# EAGLE board matchbox_bob_v01 (EAGLE 7.4.0)
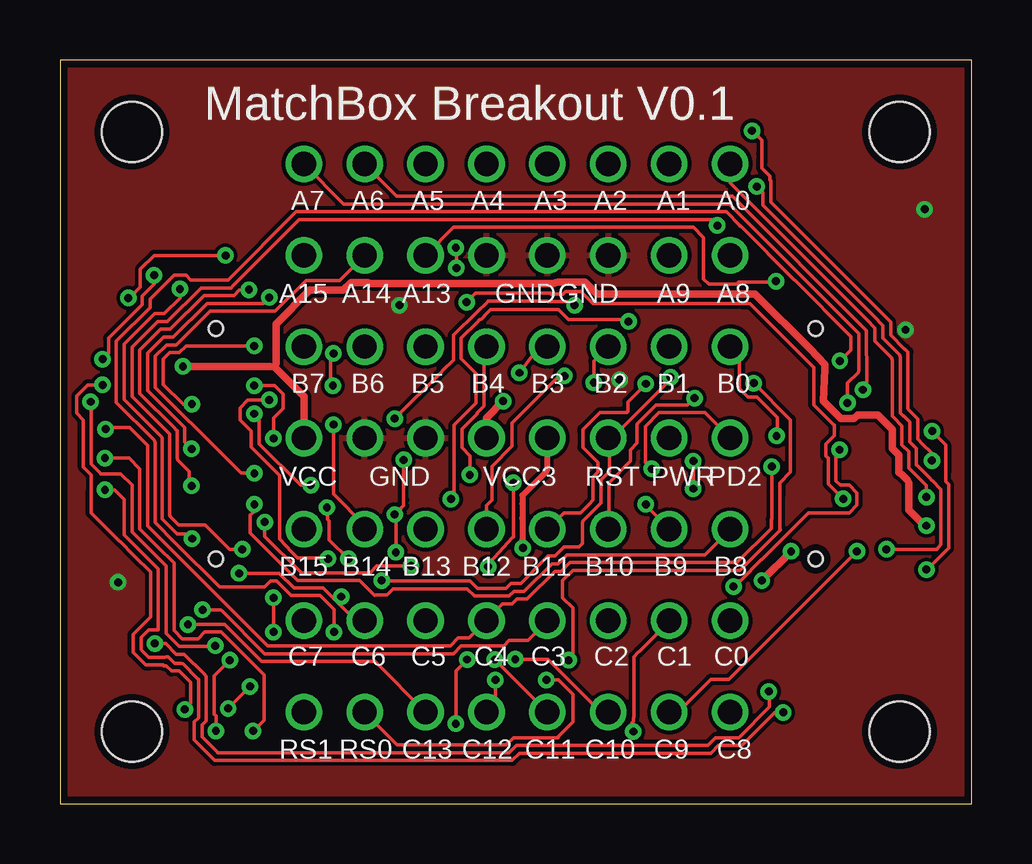
[diagram p0: board, top side]
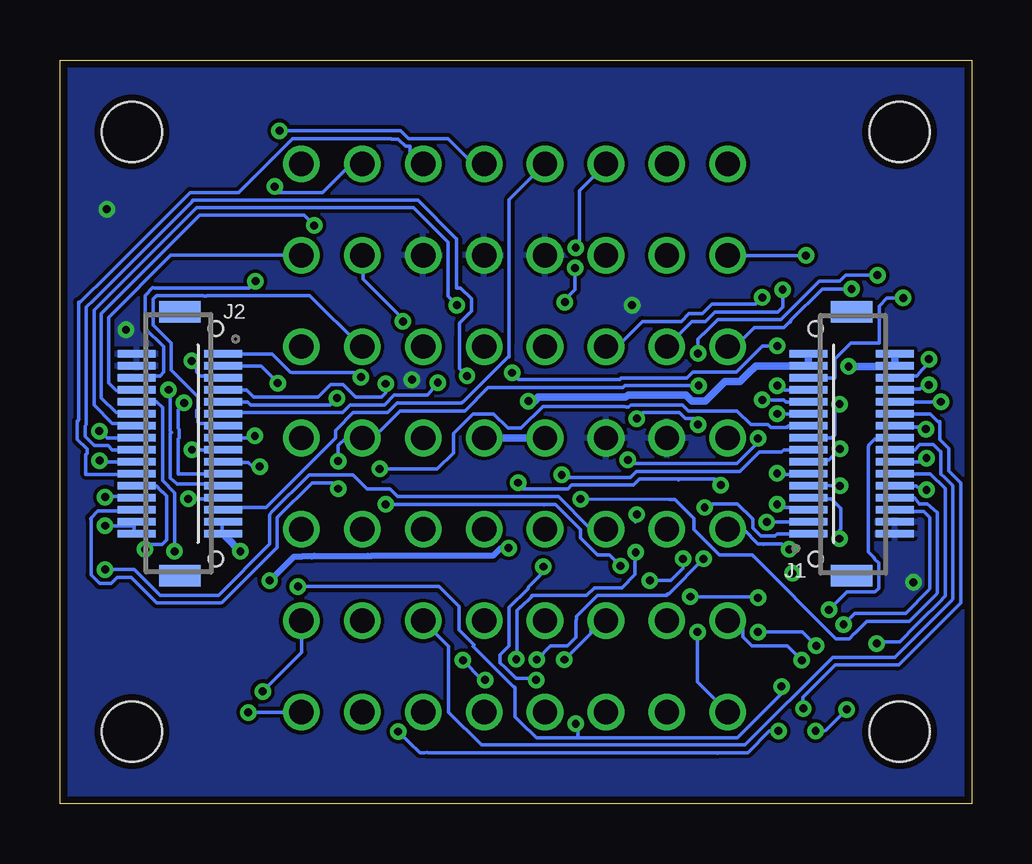
[diagram p1: board, bottom side, seen from below]

Size 38 x 31 mm. Coordinates in mm from the lower left corner, seen from the top.
Outline: 0,0 38,0 38,31 0,31 0,0
Copper layers (1*16): Top 0.0356mm / dielectric 1.5011mm / Bottom 0.0356mm
Design rules "LaenPCBOrder (2) *": minimum track width 6mil, minimum drill 13mil, track to track 6mil, track to pad 6mil, pad to pad 6mil, via to via 6mil, smd to smd 6mil, copper to edge 12mil, drill to drill 6mil, minimum pad ring 7mil, minimum via ring 7mil, stop-mask expansion 14mil, vias tented up to drill 14mil, thermal gap 6mil
Holes 2.5 mm at 3,28 35,28 35,3 3,3

## Footprints (pad centres in the part's own frame; a part is rotated, then mirrored left to right if it is on the bottom)
DF12-32-DS = smd 0.3 x 1.6: 1 -3.75,1.8; 2 -3.75,-1.8; 3 -3.25,1.8; 4 -3.25,-1.8; 5 -2.75,1.8; 6 -2.75,-1.8; 7 -2.25,1.8; 8 -2.25,-1.8; 9 -1.75,1.8; 10 -1.75,-1.8; 11 -1.25,1.8; 12 -1.25,-1.8; 13 -0.75,1.8; 14 -0.75,-1.8; 15 -0.25,1.8; 16 -0.25,-1.8; 17 0.25,1.8; 18 0.25,-1.8; 19 0.75,1.8; 20 0.75,-1.8; 21 1.25,1.8; 22 1.25,-1.8; 23 1.75,1.8; 24 1.75,-1.8; 25 2.25,1.8; 26 2.25,-1.8; 27 2.75,1.8; 28 2.75,-1.8; 29 3.25,1.8; 30 3.25,-1.8; 31 3.75,1.8; 32 3.75,-1.8 | smd 0.889 x 1.727: F1 -5.5,0; F2 5.5,0 | hole 0.6: -4.8,1.5; 4.8,1.5
1X08_FEMALE_LOCK = drill 1.016: 1 0,0; 2 2.54,0; 3 5.08,0; 4 7.62,0; 5 10.16,0; 6 12.7,0; 7 15.24,0; 8 17.78,0

## Placement (x,y rotation side)
J1  DF12-32-DS  [DF12-32-DS]  5,15 90 bottom
J2  DF12-32-DS  [DF12-32-DS]  33,15 270 bottom
PA0_7  [1X08_FEMALE_LOCK]  27.94,26.67 180 top
PA8_15  [1X08_FEMALE_LOCK]  27.94,22.86 180 top
PB0_7  [1X08_FEMALE_LOCK]  27.94,19.05 180 top
PB8_15  [1X08_FEMALE_LOCK]  27.94,11.43 180 top
PC0_7  [1X08_FEMALE_LOCK]  27.94,7.62 180 top
PC8_15  [1X08_FEMALE_LOCK]  27.94,3.81 180 top
PWR  [1X08_FEMALE_LOCK]  27.94,15.24 180 top

## Library data of the parts
J1 J2 = micro1292; PARTNO: AS-ITM-00012
PA0_7 PA8_15 PB0_7 PB8_15 PC0_7 PC8_15 PWR = SparkFun-Connectors

## Nets
GND: J1.2 J1.4 J2.2 J2.4 PA8_15.3 PA8_15.4 PA8_15.5 PWR.6 PWR.7
PA0: J2.26 PA0_7.1
PA1: J2.24 PA0_7.2
PA2: J2.22 PA0_7.3
PA3: J2.20 PA0_7.4
PA4: J2.27 PA0_7.5
PA5: J2.25 PA0_7.6
PA6: J2.23 PA0_7.7
PA7: J2.21 PA0_7.8
PA8: J2.8 PA8_15.1
PA9: J1.8 PA8_15.2
PA13: J2.6 PA8_15.6
PA14: J1.11 PA8_15.7
PA15: J1.27 PA8_15.8
PB0: J2.15 PB0_7.1
PB1: J2.13 PB0_7.2
PB2: J2.11 PB0_7.3
PB3: J1.17 PB0_7.4
PB4: J1.15 PB0_7.5
PB5: J1.13 PB0_7.6
PB6: J1.9 PB0_7.7
PB7: J1.7 PB0_7.8
PB8: J1.5 PB8_15.1
PB9: J1.3 PB8_15.2
PB10: J2.9 PB8_15.3
PB11: J2.7 PB8_15.4
PB12: J2.18 PB8_15.5
PB13: J2.16 PB8_15.6
PB14: J2.14 PB8_15.7
PB15: J2.12 PB8_15.8
PC0: J1.12 PC0_7.1
PC1: J1.14 PC0_7.2
PC2: J1.16 PC0_7.3
PC3: J1.18 PC0_7.4
PC4: J1.20 J2.19 PC0_7.5
PC5: J1.22 J2.17 PC0_7.6
PC6: J1.24 PC0_7.7
PC7: J1.26 PC0_7.8
PC8: J1.10 PC8_15.1
PC9: J2.10 PC8_15.2
PC10: J1.25 PC8_15.3
PC11: J1.23 PC8_15.4
PC12: J1.21 PC8_15.5
PC13: J1.6 PC8_15.6
PD2: J1.19 PWR.1
PWR_ON: J1.28 J2.28 PWR.2
RESET#: J1.1 J2.1 PWR.3
RSV0: J2.3 PC8_15.7
RSV1: J2.5 PC8_15.8
VCC: J1.30 J1.32 J2.30 J2.32 PWR.8
VCC_3V3: J1.29 J1.31 J2.29 J2.31 PWR.4 PWR.5

## Tracks (layer width: path | path; a pad name or v marks a point on that pad's centre or on a via)
GND  (via drill 0.33)
  other vias: 2.42,9.22 35.25,19.75 36.05,24.77 14.15,20.77 23.32,17.68
  pour Top: 0,0 38,0 38,31 0,31
  pour Bottom: 0,0 38,0 38,31 0,31
PA0  (via drill 0.33)
  Top 0.152: v36.12,12.78 36.12,13.26 36.08,13.3 35.38,14 35.38,14.68 35.1,14.95 35.1,15.75 34.75,16.1 34.7,16.15 34.7,18.5 34.67,18.52 34.67,18.57 33.98,19.27 33.98,19.75 33.98,19.82 33.62,20.18 27.94,25.86 PA0_7.1
  Bottom 0.152: v36.12,12.78 35.97,12.8 34.9,12.8 J2.26
PA1  (via drill 0.33)
  Top 0.152: v29.05,25.73 29.3,25.48 29.3,24.95 33.92,20.32 34.3,19.93 34.3,19.4 35,18.7 35,18.65 35.02,18.62 35.02,16.27 35.15,16.15 35.17,16.15 35.42,15.9 35.42,15.07 35.7,14.8 35.7,14.12 35.75,14.07 36.27,13.55 36.33,13.5 36.38,13.45 36.7,13.12 36.73,13.1 36.73,10.8 36.55,10.6 v34.45,10.6
  Bottom 0.152: v29.05,25.73 29.05,25.48 27.05,25.48 26.05,26.48 26.05,26.68 PA0_7.2 | v34.45,10.6 34.27,10.8 33.75,10.8 33.55,11 33.55,12.82 33.73,13 33.75,13 33.9,13.15 33.9,13.18 33.98,13.25 J2.24
PA2
  Bottom 0.152: PA0_7.3 22.88,26.68 23.38,26.68 23.4,26.7 23.4,27.4 23.6,27.4 23.9,27.7 24.18,27.7 24.2,27.73 28.3,27.73 30.55,25.48 32.58,25.48 35.88,22.18 35.92,22.12 37.15,20.9 37.23,20.9 37.23,16.02 37.25,15.95 37.27,15.95 37.27,15.18 36.88,14.78 36.88,14.6 36.92,14.55 36.92,13.72 35.55,13.72 35.52,13.75 34.83,13.75 J2.22
PA3  (via drill 0.33)
  Top 0.152: v28.85,28.05 29.25,27.65 29.25,27.07 29.25,26.82 29.25,26.7 29.25,26.5 29.6,26.15 29.6,26 29.62,25.98 29.62,25.07 34.12,20.57 34.62,20.07 34.62,20 34.62,19.52 35.2,18.95 35.23,18.95 35.35,18.82 35.35,16.48 35.38,16.4 35.75,16.02 35.75,15.2 35.98,14.97 36.3,14.65 36.3,14.38 v36.35,14.3
  Bottom 0.152: v28.85,28.05 28.1,28.05 23.8,28.05 23.48,27.73 21.82,27.73 20.95,26.85 20.95,26.68 PA0_7.4 | v36.35,14.3 36.3,14.25 34.83,14.25 J2.20
PA4
  Bottom 0.152: J2.27 31.09,12.34 29.41,12.34 26.52,15.24 26.52,15.54 26.48,15.6 25.77,16.3 24.48,16.3 24.35,16.3 23.95,16.7 21.32,16.7 21.25,16.69 21.23,16.75 21.2,16.75 19.32,18.62 19.27,18.62 19.27,19.18 19.27,25.18 PA0_7.5
PA5  (via drill 0.33)
  Top 0.152: v32.65,12.7 32.02,13.32 32.02,14.12 32.02,14.4 31.98,14.45 31.93,14.5 31.93,15 32.27,15.35 32.27,15.57 32.27,15.78 32.23,15.82 31.43,16.62 31.43,16.7 31.43,18.18 28.75,20.85 28.38,20.85 28.3,20.85 28.23,20.85 22.23,20.85 21.73,21.35 21.18,21.35 21.1,21.35 21.07,21.35 20.98,21.25 20.48,21.25 20.45,21.27 17.32,21.27 v16.95,20.9 | v16.52,22.32 16.52,23.15 v16.5,23.18
  Bottom 0.152: PA0_7.6 16.31,25.6 16.35,25.55 16.35,23.32 v16.5,23.18 | 31.09,12.8 J2.25 31.25,12.7 v32.65,12.7 | v16.52,22.32 16.52,21.43 17.05,20.9 v16.95,20.9
PA6  (via drill 0.33)
  Top 0.152: PA0_7.7 12.7,26.65 14.03,25.32 28.02,25.32 33.62,19.73 33.62,17.62 33.62,17.45 v33.47,17.25
  Bottom 0.152: 31.24,13.26 J2.23 31.35,13.32 33.12,13.32 33.4,13.57 33.4,15.43 33.35,15.47 33.4,15.53 33.4,17.25 33.45,17.25 v33.47,17.25
PA7  (via drill 0.33)
  Top 0.152: PA0_7.8 10.18,26.65 11.82,25 27.9,25 27.95,24.95 32.9,20 32.95,19.95 33.3,19.6 33.3,18.05 33.27,17.98 32.83,17.52 v32.83,16.7
  Bottom 0.152: v32.83,16.7 32.83,17 v32.83,16.7 | J2.21 | J2.21 31.27,13.75 33.08,13.75 33.08,15.2 33.02,15.25 33.02,15.32 33.02,15.6 33.08,15.65 33.08,16.4 32.85,16.62 v32.83,16.7
PA8
  Bottom 0.152: J2.8 34.9,17.22 35.66,17.22 35.97,17.53 35.97,20.27 33.38,22.86 28.04,22.86 PA8_15.1
PA9  (via drill 0.33)
  Top 0.152: v16.3,12.7 16.35,12.47 16.3,12.85 16.3,12.82 16.43,12.95 16.43,15.78 17.35,16.7 17.35,17.93 16.73,18.55 16.73,19.4 17.43,20.1 17.48,20.15 17.5,20.18 17.57,20.2 17.7,20.32 17.7,20.35 17.95,20.6 20.77,20.6 20.9,20.48 21.2,20.18 23.62,20.18 v23.7,20.1
  Bottom 0.152: v16.3,12.7 12.6,12.68 12.37,12.68 11.58,11.89 11.58,11.43 10.52,10.36 9.14,10.36 9.1,10.3 9.07,10.3 5.65,6.88 5.1,6.88 4.9,7.08 4.85,7.12 4.38,7.6 4.22,7.6 2.6,7.6 1.48,8.72 1.43,8.78 1.43,12.14 1.83,12.5 2.17,12.5 2.38,12.75 J1.8 | PA8_15.2 25.38,22.75 25.38,21.88 23.62,20.12 v23.7,20.1
PA13  (via drill 0.33)
  Top 0.152: PA8_15.6 15.25,22.88 16.4,24.02 21.25,24.02 21.32,24.02 26.4,24.02 26.82,23.6 26.82,21.88 27.05,21.65 28.23,21.65 28.25,21.68 28.27,21.75 29.82,21.75 v29.85,21.77
  Bottom 0.152: J2.6 34.75,17.83 33.83,17.83 33.68,17.98 33.68,19.05 34.44,19.81 34.44,21.18 34.13,21.5 34.05,21.5 33.98,21.5 30.12,21.5 v29.85,21.77
PA14  (via drill 0.33)
  Top 0.152: v8.11,13.77 v8.1,13.78 7.55,13.78 6.88,14.45 3.98,17.35 3.98,17.5 3.98,18.65 4.45,19.12 4.85,19.12 6.2,20.48 6.25,20.52 6.33,20.52 8.97,20.52 10.25,21.8 10.3,21.8 11.65,21.8 PA8_15.7
  Bottom 0.152: v8.11,13.77 7.82,13.77 7.75,13.72 6.86,13.72 J1.11
PA15  (via drill 0.33)
  Top 0.152: v2.85,21.07 2.9,21.07 3.35,21.52 3.35,22.27 3.92,22.85 v6.9,22.85
  Bottom 0.152: J1.27 5.7,17.75 5.7,18.54 5.04,19.2 3.85,19.2 3.85,20.75 3.52,21.07 v2.85,21.07 | J1.27 | v6.9,22.85 PA8_15.8
PB0  (via drill 0.33)
  Top 0.152: 29.88,15.4 v29.88,15.32 29.9,15.47 29.9,16.1 29.05,16.95 28.68,16.95 28.32,17.3 28.32,17.65 28.32,18.68 PB0_7.1
  Bottom 0.152: v29.88,15.32 29.95,15.25 30.23,15.25 31.18,15.25 J2.15
PB1
  Bottom 0.152: J2.13 31.24,15.85 32.16,15.85 32.24,15.88 32.25,16.07 32.3,16.12 32.3,16.4 32.25,16.45 32.25,16.48 32.23,16.5 32.25,16.52 32.25,16.95 32.48,17.18 33.38,18.07 33.38,19.2 34.12,19.95 34.12,21.02 33.98,21.18 32.02,21.18 32,21.15 31.9,21.15 31.88,21.18 27.65,21.18 27.58,21.18 25.45,19.05 PB0_7.2
PB2  (via drill 0.33)
  Top 0.152: v22.25,17.55 22.25,18.45 PB0_7.3
  Bottom 0.152: J2.11 31.09,16.31 26.21,16.31 26.18,16.35 26.15,16.38 25.9,16.62 24.55,16.62 24.48,16.62 24.07,17.02 22.68,17.02 v22.25,17.55
PB3  (via drill 0.33)
  Top 0.152: v19.15,17.96 19.96,19.05 PB0_7.4 | v8.1,19.07 5.25,19.07 4.97,18.8 4.58,18.8 4.3,18.52 4.3,18 4.3,17.48 5.12,16.65 v5.5,16.65
  Bottom 0.152: v19.15,17.96 18.89,17.68 18.52,17.68 14.65,17.68 14.62,17.75 11.93,17.75 11.88,17.75 11.62,18 9.88,18 9.8,18 9.75,18.05 8.72,19.07 8.45,19.07 v8.1,19.07 | v5.5,16.65 5.7,16.45 5.7,15.38 5.72,15.38 5.85,15.25 J1.17
PB4  (via drill 0.33)
  Top 0.152: PB0_7.5 17.68,19.05 17.68,16.59 17.65,16.55 17.38,16.27 17.38,16.25 16.75,15.62 16.75,14.85 17.1,14.5 17.1,13.72 v17.08,13.71
  Bottom 0.152: v17.07,13.7 v17.08,13.71 17,13.6 16.75,13.6 14.22,13.6 13.97,13.85 9.65,13.85 8.93,14.57 8.85,14.65 7.92,14.65 7.83,14.75 6.83,14.75 J1.15
PB5  (via drill 0.33)
  Top 0.152: v5.49,14.78 5.47,14.8 5.2,15.07 5.2,15.68 5.15,15.72 3.65,17.23 3.65,18.77 4.33,19.45 4.72,19.45 6.12,20.85 6.88,20.85 6.95,20.85 8.47,20.85 8.6,20.98 v8.72,21.1
  Bottom 0.152: v5.49,14.78 5.94,14.33 6.71,14.33 J1.13 | 14.63,19.05 PB0_7.6 14.6,19.12 14.6,19.23 13.72,20.1 12.1,20.1 11.78,20.43 11.22,20.43 10.82,20.82 9,20.82 v8.72,21.1
PB6  (via drill 0.33)
  Top 0.152: v5.48,13.24 5.5,13.28 5.38,13.4 5.38,13.85 4.9,14.32 4.88,14.4 4.88,15.54 4.83,15.6 4.78,15.65 3.33,17.1 3.33,18.9 4.2,19.77 4.6,19.77 6,21.18 7,21.18 7.08,21.18 7.25,21.18 7.47,21.4 7.6,21.4 7.85,21.4 v7.88,21.43
  Bottom 0.152: v5.48,13.24 5.94,13.26 6.71,13.26 J1.9 | v7.88,21.43 7.88,20.7 8.07,20.5 10.7,20.5 11.1,20.1 11.65,20.1 PB0_7.7
PB7  (via drill 0.33)
  Top 0.152: v5.51,11.04 v5.5,11.05 5.3,11.25 4.97,11.25 4.88,11.25 4.28,11.85 4.27,11.86 4.27,12.66 4.27,15.24 4.22,15.3 2.67,16.85 2.67,19.15 3.95,20.43 4.35,20.43 5,21.07 v5,21.45
  Bottom 0.152: v5.51,11.04 v5.5,11.05 5.5,11.4 5.45,11.45 5.45,12.3 5.6,12.45 5.85,12.7 6.08,12.7 6.12,12.75 J1.7 | J1.7 | v5,21.45 6.22,21.45 7.53,20.15 7.55,20.07 7.6,20.07 7.83,19.85 9.05,19.85 9.2,19.7 9.53,19.38 9.53,19.05 PB0_7.8
PB8  (via drill 0.33)
  Top 0.152: v8.11,12.47 8.11,12.17 7.92,12.04 7.92,11.28 9.91,9.3 12.5,9.3 13.11,8.69 13.18,8.7 13.62,8.7 13.88,8.95 16.27,8.95 16.3,8.95 16.32,8.95 16.98,8.95 17.27,8.65 18.18,8.65 18.27,8.65 18.73,8.65 18.93,8.85 19.35,8.85 20.5,10 20.75,10 21.12,10.38 24.68,10.38 24.75,10.38 26.88,10.38 27.93,11.43 PB8_15.1
  Bottom 0.152: v8.11,12.47 7.92,12.34 6.86,12.34 J1.5
PB9  (via drill 0.33)
  Top 0.152: v14.63,9.91 v14.62,9.9 13.2,9.9 12.93,9.62 10.85,9.62 10.8,9.62 10.05,9.62 10,9.68 8.53,11.14 v8.53,11.73 | v24.43,12.47 24.43,12.43 25.4,11.45 PB8_15.2
  Bottom 0.152: v8.53,11.73 6.86,11.73 J1.3 | v24.43,12.47 17.85,12.47 17.82,12.45 17.8,12.47 17.35,12.47 17.3,12.43 16.35,11.47 16.3,11.43 16.3,11.35 16.3,11.07 15.6,10.38 15.1,10.38 14.65,9.93 v14.63,9.91
PB10  (via drill 0.33)
  Top 0.152: 22.86,11.73 PB8_15.3 22.88,11.8 22.88,12.7 22.88,13.38 23.77,14.28 23.77,14.75 24.05,15.03 24.05,15.78 24.08,15.85 24.84,16.61 25.3,16.61 26.16,16.61 v26.45,16.9
  Bottom 0.152: 31.09,16.76 J2.9 31.02,16.75 30.18,16.75 30.05,16.62 27.12,16.62 26.75,16.62 v26.45,16.9
PB11  (via drill 0.33)
  Top 0.152: v24.43,17.5 23.68,16.75 23.68,16.35 23.62,16.3 22.9,16.3 22.5,16.3 21.8,15.6 21.8,15.53 21.8,14.85 22.43,14.22 22.43,14.2 22.43,13.82 22.23,13.62 22.23,12.65 22.05,12.47 22,12.43 21.7,12.12 21.62,12.12 21,12.12 20.32,11.45 PB8_15.4
  Bottom 0.152: J2.7 30.23,17.25 29.93,16.95 27.25,16.95 27.2,17 26.73,17.48 26.2,17.48 25.68,16.95 24.6,16.95 24.43,17.12 v24.43,17.5
PB12  (via drill 0.33)
  Top 0.152: v21.03,17.83 v21.02,17.82 20.8,17.82 18.85,15.88 18.85,14.9 18,14.05 18,12.65 17.77,12.43 17.77,11.45 PB8_15.5
  Bottom 0.152: v21.03,17.83 21.34,18.14 21.34,19.51 21.34,20.04 20.95,20.43 20.85,20.52 20.85,21.05 21.3,21.5 21.48,21.5 21.48,23.55 21.52,23.6 23.07,25.15 32.46,25.15 32.5,25.1 36.6,21 36.9,20.7 36.9,15.8 36.95,15.75 36.95,15.3 36.85,15.2 36.58,14.93 36,14.93 35.83,14.75 34.83,14.75 J2.18
PB13  (via drill 0.33)
  Top 0.152: v36.36,15.53 36.38,15.5 36.92,14.95 36.92,13.8 36.92,13.43 37.05,13.3 37.05,10.72 37.05,10.65 36.73,10.32 36.17,9.78 36.12,9.78 v36.12,9.75
  Bottom 0.152: v36.36,15.53 36.02,15.24 34.9,15.24 J2.16 | v36.12,9.75 34.9,9.75 33.83,8.69 31.39,8.69 29.26,10.82 29.26,12.04 29.23,12.1 29.18,12.15 27.62,13.7 25.77,13.7 25.2,13.12 24.25,13.12 24.18,13.05 23.93,12.8 17.23,12.8 15.93,11.5 15.88,11.5 PB8_15.6 15.85,11.43
PB14  (via drill 0.33)
  Top 0.152: v21.45,20.77 21.3,20.93 20.35,20.93 20.32,20.95 17.85,20.95 17.77,20.88 17.43,20.52 17.38,20.5 16.4,19.52 16.4,19.45 16.4,18.5 15.95,18.05 15.9,18 v13.95,16.05 | v11.4,15.8 11.4,12.9 12.7,11.6 12.7,11.45 PB8_15.7
  Bottom 0.152: J2.14 34.9,15.85 35.81,15.85 36.58,16.61 36.58,20.57 32.31,24.84 23.27,24.84 21.82,23.4 21.82,21.15 v21.45,20.77 | v11.4,15.8 11.4,15.93 11.53,16.05 11.93,16.05 12.18,16.3 13.7,16.3 v13.95,16.05
PB15  (via drill 0.33)
  Top 0.152: 4.57,15.39 4.57,13.72 4.58,12.82 4.58,12.03 4.6,11.97 4.95,11.62 6.05,11.62 7.08,10.6 v7.6,10.6 | 4.57,15.4 4.57,15.39 | 6.8,21.5 5.88,21.5 4.47,20.1 4.08,20.1 3,19.02 3,16.98 4.53,15.45 4.57,15.39 | 6.8,21.5 7.12,21.5 | 7.12,21.5 6.8,21.5 | 7.12,21.5 7.2,21.57 9.97,24.35 14.82,24.35 14.88,24.35 14.93,24.35 27.15,24.35 v27.4,24.1
  Bottom 0.152: v7.6,10.6 7.67,10.6 7.9,10.82 8.65,10.82 8.68,10.8 8.7,10.82 8.9,10.82 9.5,11.43 PB8_15.8 | J2.12 34.77,16.27 34.48,16.27 34.48,16.25 34.77,16.25 34.8,16.27 34.83,16.27 34.9,16.31 35.66,16.31 36.27,16.92 36.27,20.42 32.46,24.23 32.42,24.27 32.17,24.52 32.1,24.52 27.82,24.52 v27.4,24.1 | J2.12
PC0  (via drill 0.33)
  Top 0.152: v29.55,4.67 29.57,4.03 28.3,2.75 27.32,2.75 27,2.42 19.02,2.42 18.73,2.12 6.58,2.12 6.53,2.17 5.92,2.77 5.92,3.27 6.1,3.45 6.1,5.3 6,5.4 5.17,6.22 4.85,6.22 4.4,6.67 v3.95,6.67
  Bottom 0.152: J1.12 3.17,13.75 1.72,13.75 1.1,13.13 1.1,11.93 1.1,11.85 1.1,8.78 1.1,8.7 1.1,8.65 1.18,8.57 1.23,8.53 1.25,8.5 2.23,7.53 2.27,7.47 2.3,7.45 3,6.75 3.8,6.75 v3.95,6.67 | v29.55,4.67 27.93,6.3 27.93,7.61 PC0_7.1
PC1  (via drill 0.33)
  Top 0.152: v8.05,3.02 8.5,3.48 8.5,5.38 6.72,7.15 6.03,7.15 5.75,6.88 5.1,6.88 4.75,7.22 4.75,10.03 4.08,10.7 3.33,11.45 3.33,12.25 3.33,12.75 3.33,12.82 3.33,13.95 2.88,14.4 v1.88,14.4 | PC0_7.2 25.4,7.6 24.15,6.35 24.1,6.3 23.93,6.12 23.93,3.6 23.9,3.58 23.9,3.42 23.85,3.38 23.85,3 v23.9,3
  Bottom 0.152: v1.88,14.4 1.98,14.25 3.17,14.25 J1.14 | v8.05,3.02 8.43,3.02 9.32,2.12 10.57,2.12 10.6,2.1 10.62,2.12 22.65,2.12 22.71,2.13 22.77,2.12 23,2.12 v23.9,3
PC2
  Bottom 0.152: 3.77,6.1 5.79,6.1 9.45,2.44 20.42,2.44 21.79,3.81 21.79,6.55 PC0_7.3 | 3.77,6.1 3.66,6.1 | 3.17,14.75 J1.16 3.1,14.75 2.38,14.75 2.15,14.97 1.6,14.97 1.35,14.72 1.3,14.68 1.27,14.68 1.27,14.22 1.27,14.15 1.27,13.8 1.27,13.75 1.12,13.6 1.07,13.55 0.85,13.32 0.8,13.28 0.78,13.25 0.78,9.9 0.78,9.82 0.78,9 0.78,8.93 0.78,8.85 0.78,8.6 0.78,8.53 0.82,8.47 3.2,6.1 3.77,6.1
PC3  (via drill 0.33)
  Top 0.152: v5.94,8.08 6.71,8.08 6.75,8.03 8.53,6.25 16.4,6.25 16.73,6.58 18.5,6.58 18.73,6.8 19.5,6.8 PC0_7.4
  Bottom 0.152: J1.18 3.88,15.25 3.92,15.2 4.03,15.2 4.28,14.95 4.3,14.88 4.3,10.5 4.05,10.25 4.03,10.18 3.88,10.03 3.88,8.97 4.03,8.82 5.2,8.82 5.92,8.1 v5.94,8.08
PC4  (via drill 0.33)
  Top 0.152: v1.9,15.61 1.9,15.62 1.95,15.68 2.9,15.68 3.65,14.93 3.65,11.57 8.65,6.58 8.72,6.58 16.27,6.58 16.6,6.9 17.05,6.9 17.73,7.58 PC0_7.5 | v29.68,14.05 29.68,11.88 29.65,11.85 29.65,11.47 28.23,10.05 21.25,10.05 20.95,9.75 20.9,9.7 20.88,9.68 20.62,9.68 19.48,8.53 19.07,8.53 19.05,8.53 18.85,8.32 18.45,8.32 17.85,7.72 PC0_7.5 | 17.85,7.65 PC0_7.5
  Bottom 0.152: v1.9,15.61 1.9,15.76 2.29,15.7 3.05,15.7 J1.20 | v29.68,14.05 29.98,14.05 30.15,14.22 30.45,14.22 30.48,14.25 31.18,14.25 J2.19
PC5  (via drill 0.33)
  Top 0.152: v7.92,4.88 v7.01,3.96 | v16.5,3.33 16.5,5.53 v16.98,6 | v28.07,9.05 28.3,9.28 28.38,9.3 29.23,10.15 29.25,10.18 30.38,11.3 30.43,11.35 31.2,12.12 32.9,12.12 33.23,12.45 33.23,12.95 32.9,13.28 32.52,13.28 32.35,13.45 32.35,14.6 v32.5,14.75
  Bottom 0.152: 15.85,7.62 PC0_7.6 15.88,7.55 15.88,7.1 v16.98,6 | v7.92,4.88 7.92,4.57 9.75,2.74 16.4,2.74 | 16.4,2.74 18.14,2.74 18.8,3.38 19.02,3.61 19.02,4.8 19.05,4.88 19.1,4.88 20.77,6.55 20.75,6.62 21.38,7.25 21.38,8.18 21.38,8.22 22.2,9.05 v28.07,9.05 | v16.5,3.33 16.43,3.33 16.4,3.3 16.4,2.74 | J1.22 1.73,16.25 1.4,15.93 1.32,15.93 1.32,15.18 0.95,14.8 0.95,13.88 0.45,13.38 0.45,8.38 3.03,5.79 3.1,5.78 5.67,5.78 7.03,4.42 7.03,3.98 v7.01,3.96 | J2.17 v32.5,14.75
PC6  (via drill 0.33)
  Top 0.152: v7.47,9.6 9.14,9.6 9.75,8.99 10.97,8.99 11.53,8.43 | 11.53,8.43 12.34,7.62 12.65,7.62 PC0_7.7 | v6.47,6.58 6.45,6.55 4.97,6.55 4.92,6.6 4.42,7.1 4.42,9.9 3,11.32 3,13.28 2.52,13.75 2.45,13.75 1.7,13.75 1.65,13.8 1.3,14.15 1.3,14.97 1.3,16.73 v1.27,16.75 | v8.9,8.57 v8.9,7.15 | v11.72,8.62 11.57,8.47 11.53,8.43
  Bottom 0.152: 3.2,16.76 J1.24 | 3.12,16.75 J1.24 | v6.47,6.58 7.05,7.15 v8.9,7.15 | v8.9,8.57 8.95,8.62 v11.72,8.62 | J1.24 3.05,16.75 1.3,16.75 v1.27,16.75
PC7  (via drill 0.33)
  Top 0.152: v6.5,3.02 6.5,3.65 6.42,3.73 6.42,5.33 v7.08,5.97 | v5.2,3.92 5.45,4.17 5.45,5.05 4.97,5.53 4.65,5.53 4.42,5.75 4.33,5.75 4.3,5.78 3.7,5.78 3.58,5.78 3.52,5.83 3.05,6.3 3.05,7.05 3.77,7.78 3.77,9.65 3.1,10.32 3.05,10.38 2.52,10.9 2.48,10.95 2.45,10.97 1.3,12.12 1.3,13 1.3,13.7 1.25,13.75 0.97,14.03 0.97,16 0.7,16.27 0.7,17 1.15,17.45 v1.77,17.45
  Bottom 0.152: v6.5,3.02 6.15,3.02 6.08,3.05 v5.2,3.92 | v7.08,5.97 7.67,6.58 9.15,6.58 9.53,6.95 9.53,7.62 PC0_7.8 | v1.77,17.45 1.98,17.45 2.15,17.27 2.45,17.27 2.48,17.25 3.17,17.25 J1.26
PC8  (via drill 0.33)
  Top 0.152: v30.15,3.8 29.8,3.8 28.43,2.42 27.45,2.42 27.12,2.1 19.15,2.1 18.85,1.8 6.45,1.8 6.4,1.85 5.6,2.65 5.6,3.4 5.78,3.58 5.78,5.17 5.72,5.22 5.12,5.83 5.05,5.85 4.78,5.85 4.5,6.12 4.42,6.12 4.35,6.1 3.7,6.1 3.42,6.38 3.38,6.42 3.38,6.92 3.7,7.25 4.1,7.25 4.1,7.33 4.1,7.78 4.1,7.85 4.1,8.43 4.1,8.5 4.1,9 4.1,9.07 4.1,9.57 4.1,9.65 4.1,9.72 4.1,9.78 3.67,10.2 2.67,11.2 2.67,11.22 2.67,12.68 2.27,13.07 v1.88,13.07
  Bottom 0.152: 3.17,13.25 J1.10 3.1,13.25 2.3,13.25 2.12,13.07 v1.88,13.07 | v30.15,3.8 PC8_15.1
PC9  (via drill 0.33)
  Top 0.152: v33.22,10.52 27.89,5.18 27.13,5.18 25.76,3.81 25.45,3.81 PC8_15.2
  Bottom 0.152: v33.22,10.52 33.22,12.95 33.73,13.46 33.73,16.51 33.98,16.76 34.75,16.76 J2.10
PC10  (via drill 0.33)
  Top 0.152: v14.33,14.33 14.32,12.65 14.32,12.43 v13.95,12.05 14,12 v14,10.47 | v18.98,6.02 20.35,6.02 22.55,3.81 PC8_15.3 | v8.1,17.43 8.95,17.43 9.3,17.07 9.3,16.48 8.9,16.07 v8.9,15.22
  Bottom 0.152: v13.95,12.05 13.95,11.91 14.02,11.73 | 6.86,17.22 J1.25 6.92,17.25 7.92,17.25 v8.1,17.43 | v8.9,15.22 8.9,15.05 9.53,14.43 9.78,14.18 14.18,14.18 v14.32,14.32 v14.33,14.33 | v14,10.47 14.03,10.47 14.03,9.55 14.57,9 15.72,9 16.05,8.68 16.12,8.68 18.32,8.68 18.35,8.65 18.35,8.62 18.77,8.2 18.8,8.2 18.95,8.05 18.95,6.58 18.95,6.05 v18.98,6.02
PC11  (via drill 0.33)
  Top 0.152: 8.7,16.77 v8.72,16.82 8.62,16.82 7.83,16.82 7.5,16.5 7.5,16 7.97,15.53 7.97,14.88 9.15,13.68 9.15,11.85 9.15,11.82 9.15,11.53 9.15,11.45 9.15,11.03 9.65,10.5 9.72,10.43 9.9,10.25 10.25,10.25 10.8,10.25 11.12,10.25 v11.18,10.2 | v18.12,6 20.3,3.83 PC8_15.4
  Bottom 0.152: v8.72,16.82 7.83,16.82 7.75,16.75 6.83,16.75 J1.23 | v18.12,6 17.55,6.58 16.85,6.58 16.5,6.92 16.5,7.62 16.48,7.7 16.48,7.8 15.6,8.68 12.7,8.68 12.68,8.75 12.62,8.75 v11.18,10.2
PC12  (via drill 0.33)
  Top 0.152: v8.1,16.25 8.3,16.02 8.3,15.6 8.3,15 10.03,13.28 v10.45,13.28 | v18.15,5.15 18.15,4.17 17.8,3.83 PC8_15.5 | v18.9,13.38 18.9,11.12 18.85,11.07 17.93,10.05 v17.85,9.88
  Bottom 0.152: 6.86,16.15 J1.21 | 6.88,16.25 J1.21 | v8.1,16.25 6.95,16.25 J1.21 | v18.9,13.38 18.9,13.2 18.9,13.12 16.82,13.12 16.68,13.28 16.6,13.28 14.1,13.28 13.85,13.53 12.25,13.53 12.22,13.5 12.2,13.53 10.7,13.53 v10.45,13.28 | 18.2,5.15 v18.15,5.15 18.23,5.22 19,5.22 19.43,5.65 19.65,5.88 19.65,6.2 19.3,6.55 19.27,6.58 19.27,7.12 19.27,7.2 19.27,8.18 18.5,8.95 18.48,9.03 17.82,9.68 17.82,9.97 v17.85,9.88
PC13  (via drill 0.33)
  Top 0.152: v5.33,7.47 6.86,7.47 6.9,7.42 8.4,5.92 13.12,5.92 PC8_15.6
  Bottom 0.152: J1.6 2.52,12.25 2.48,12.18 2,12.18 1.75,11.93 1.75,8.97 1.77,8.9 2.75,7.92 4.88,7.92 v5.33,7.47
PD2  (via drill 0.33)
  Top 0.152: v24.68,13.95 24.4,14.22 24.4,14.28 24.4,14.82 24.4,15.65 24.4,15.72 24.98,16.3 26.88,16.3 27.93,15.25 PWR.1
  Bottom 0.152: J1.19 7.62,15.75 7.72,15.68 8.38,15.68 8.5,15.8 9.2,15.8 9.78,16.38 11.8,16.38 12.05,16.62 14.2,16.62 14.3,16.52 14.4,16.52 14.47,16.55 17.88,16.55 18.77,15.65 19.32,15.65 19.93,16.25 20.77,16.25 21.6,15.43 21.6,14.62 22.27,13.95 v24.68,13.95
PWR_ON  (via drill 0.33)
  Top 0.152: v11.38,17.43 11.28,17.52 11.28,18.62 v11.4,18.75 v11.4,18.76 | v1.77,18.52 2.02,18.77 2.02,19.4 3.42,20.8 3.42,21.15 3.92,21.65 v3.92,22.02 | v26.4,14.28 v26.4,13.12
  Bottom 0.152: J2.28 34.9,12.19 36.42,12.19 36.73,11.89 36.7,11.82 36.7,9.53 36.35,9.18 35.88,9.18 35.7,9.35 35.62,9.43 35.02,9.43 33.98,8.38 31.3,8.38 31.24,8.38 28.96,10.67 28.96,11.89 28.93,11.95 27.5,13.38 26.45,13.38 26.4,13.32 v26.4,13.12 | J1.28 3.05,17.83 2.29,17.83 2.13,17.98 2.1,18.05 1.77,18.38 v1.77,18.52 | v11.38,17.43 14.45,17.43 14.53,17.35 20.15,17.35 21.12,16.38 23.82,16.38 24.75,15.45 24.75,15.25 PWR.2 25.48,15.25 26.07,15.25 26.4,14.93 v26.4,14.28 | v3.92,22.02 5.25,22.02 5.5,21.77 6.35,21.77 7.95,20.18 10.57,20.18 11.18,19.57 11.2,19.57 11.4,19.38 11.4,18.77 v11.4,18.76
RESET#  (via drill 0.33)
  Top 0.152: v12.03,10.2 11.22,11 11.22,11.78 11.15,11.85 11.15,12.32 v11.12,12.34 | 13.43,9.28 v13.41,9.3 13.5,9.28 17.1,9.28 17.4,8.97 18.45,8.97 18.6,8.97 18.8,9.18 19.23,9.18 19.73,9.68 19.73,9.7 20.35,10.32 20.62,10.32 20.68,10.38 21,10.7 21.07,10.7 21.62,10.7 21.77,10.85 21.77,11.7 21.8,11.78 22.55,12.53 22.55,13.5 22.9,13.85 22.9,15.18 PWR.3 22.93,15.28 23.05,15.28 24.7,16.93 25.45,17.68 v25.45,17.77
  Bottom 0.152: v11.12,12.34 10.97,12.5 9.75,12.5 9.14,11.89 9.12,11.82 9.12,11.5 8.78,11.15 8.2,11.15 8.18,11.18 8.1,11.25 6.88,11.25 J1.1 | v12.03,10.2 12.03,9.8 12.53,9.3 v13.4,9.3 v13.41,9.3 | 31.18,18.75 J2.1 31.1,18.75 29.15,18.75 28.4,18 28.32,17.98 25.65,17.98 v25.45,17.77
RSV0  (via drill 0.33)
  Top 0.152: v20.27,5.15 20.77,5.15 21.38,4.55 21.38,4.47 21.38,3.4 20.77,2.8 20.77,2.77 20.75,2.75 18.98,2.75 18.9,2.75 18.6,2.45 14.05,2.45 PC8_15.7 | v21.2,5.97 21.38,6.15 21.38,8.15 20.95,8.57 20.95,9.3 21.38,9.72 28.35,9.72 28.6,9.97 28.65,10.03 28.7,10.07 30.02,11.4 30,11.47 30,12.82 30,13.38 30.45,13.82 30.45,16 v28.93,17.52
  Bottom 0.152: v21.2,5.97 20.4,5.15 v20.27,5.15 | J2.3 31.18,18.25 29.62,18.25 28.93,17.55 v28.93,17.52
RSV1  (via drill 0.33)
  Top 0.152: v32.5,18.45 v32.51,18.45 32.58,18.5 32.98,18.9 32.98,19.48 30.65,21.8 30.6,21.85 28.38,24.07 28.35,24.07 28.35,24.1 27.77,24.68 13.65,24.68 13.57,24.68 9.85,24.68 7,21.82 | 6.65,21.82 5.45,21.82 5.25,22.02 4.75,22.02 3.75,21.02 3.75,20.68 2.35,19.27 2.35,16.73 3.9,15.18 3.95,15.12 3.95,15.1 3.96,15.05 3.96,12.5 3.96,11.71 4.83,10.85 6.65,9.03 6.72,9.03 7.1,9.03 8.53,9.03 8.78,9.28 9.03,9.28 9.62,8.68 10.85,8.68 11.43,8.1 v11.43,7.15 | 6.65,21.82 7,21.82 | 7,21.82 6.65,21.82 | 7,21.82 6.65,21.82
  Bottom 0.152: v32.51,18.45 32.31,18.25 32.31,17.98 32.16,17.83 31.24,17.83 J2.5 | v11.43,7.15 11.43,5.08 10.18,3.83 PC8_15.8
VCC  (via drill 0.33)
  Top 0.305: v5.12,18.23 5.58,18.23 5.6,18.23 8.75,18.23 8.95,18.2 | 8.95,18.2 10.18,16.98 10.18,15.26 PWR.8 | v36.12,11.58 36,11.62 35.38,12.25 35.38,13.38 35.33,13.5 35.1,13.72 34.98,13.8 34.98,14.53 34.7,14.8 34.7,15.6 34.1,16.2 33.25,16.2 33.1,16.05 32.55,16.05 31.82,16.77 31.88,18.12 31.88,18.3 31.27,18.95 28.98,21.25 22.38,21.25 21.88,21.75 20.75,21.75 20.52,21.68 12.97,21.68 12.82,21.73 12.12,21.73 11.8,21.4 10.47,21.4 10.4,21.4 9,20 9,18.35 8.95,18.2
  Bottom 0.152: 34.9,11.58 34.9,11.73 J2.30 | 34.9,11.58 34.9,11.28 J2.32 | v36.12,11.58 34.9,11.58
  Bottom 0.305: v5.12,18.23 3.55,18.23 3.52,18.25 J1.30 J1.32
VCC_3V3  (via drill 0.33)
  Top 0.254: v19.3,10.65 19.3,10.97 19.27,11 19.27,11.88 19.27,11.93 19.27,12.5 19.27,12.85 20.3,13.88 20.3,15.22 PWR.4
  Top 0.305: v29.26,9.3 v30.48,10.52 | v18.48,16.77 17.78,16.08 PWR.5 17.68,15.24
  Bottom 0.152: J2.29 31.24,11.73 31.24,11.28 J2.31 31.09,11.12 | 29.23,9.32 v29.26,9.3
  Bottom 0.254: v19.3,10.65 19.62,10.65 19.95,10.32 25,10.32 25.02,10.32 25.18,10.32 27.4,10.32 27.5,10.3 27.93,10.3 28.25,10.3 29.18,9.38 v29.26,9.3
  Bottom 0.305: v30.48,10.52 31.09,11.12 | v18.48,16.77 18.2,16.77 18.15,16.82 18.07,16.95 14.43,16.95 14.3,17.02 11.9,17.02 11.65,16.77 11.1,16.77 10.28,17.6 9.65,17.6 9.32,17.93 9,18.25 J1.29 J1.31 | 20.3,15.25 20.29,15.24 | 20.29,15.24 PWR.5 | PWR.4 20.29,15.24

## Text on the board
tPlace: A7 | A6 | A5 | A5 | A4 | A3 | A2 | A1 | A0 | A15 | A14 | A13 | GND | GND | A9 | A8 | B7 | B6 | B5 | B4 | B3 | B2 | B1 | B0 | VCC | GND | VCC3 | RST | PWR | PD2 | B15 | B14 | B13 | B12 | B11 | B10 | B9 | B8 | C7 | C6 | C5 | C4 | C3 | C2 | C1 | C0 | RS1 | RS0 | C13 | C12 | C11 | C10 | C9 | C8
tNames: MatchBox Breakout V0.1